# Altium PCB pcb.PcbDoc (part 6 of 9)
Units mil, origin at the board's own origin, x right, y up, seen from the top; angles counter-clockwise.
Board outline 3937.01 x 3937.01 mil, 4 copper layers (Top Layer, Ground plane, Power plane, Bottom Layer), stack 51.4 mil thick; 310 components, 276 nets, 1704 pads, 977 vias.
Unrouted connection lines stored in the file: 44.
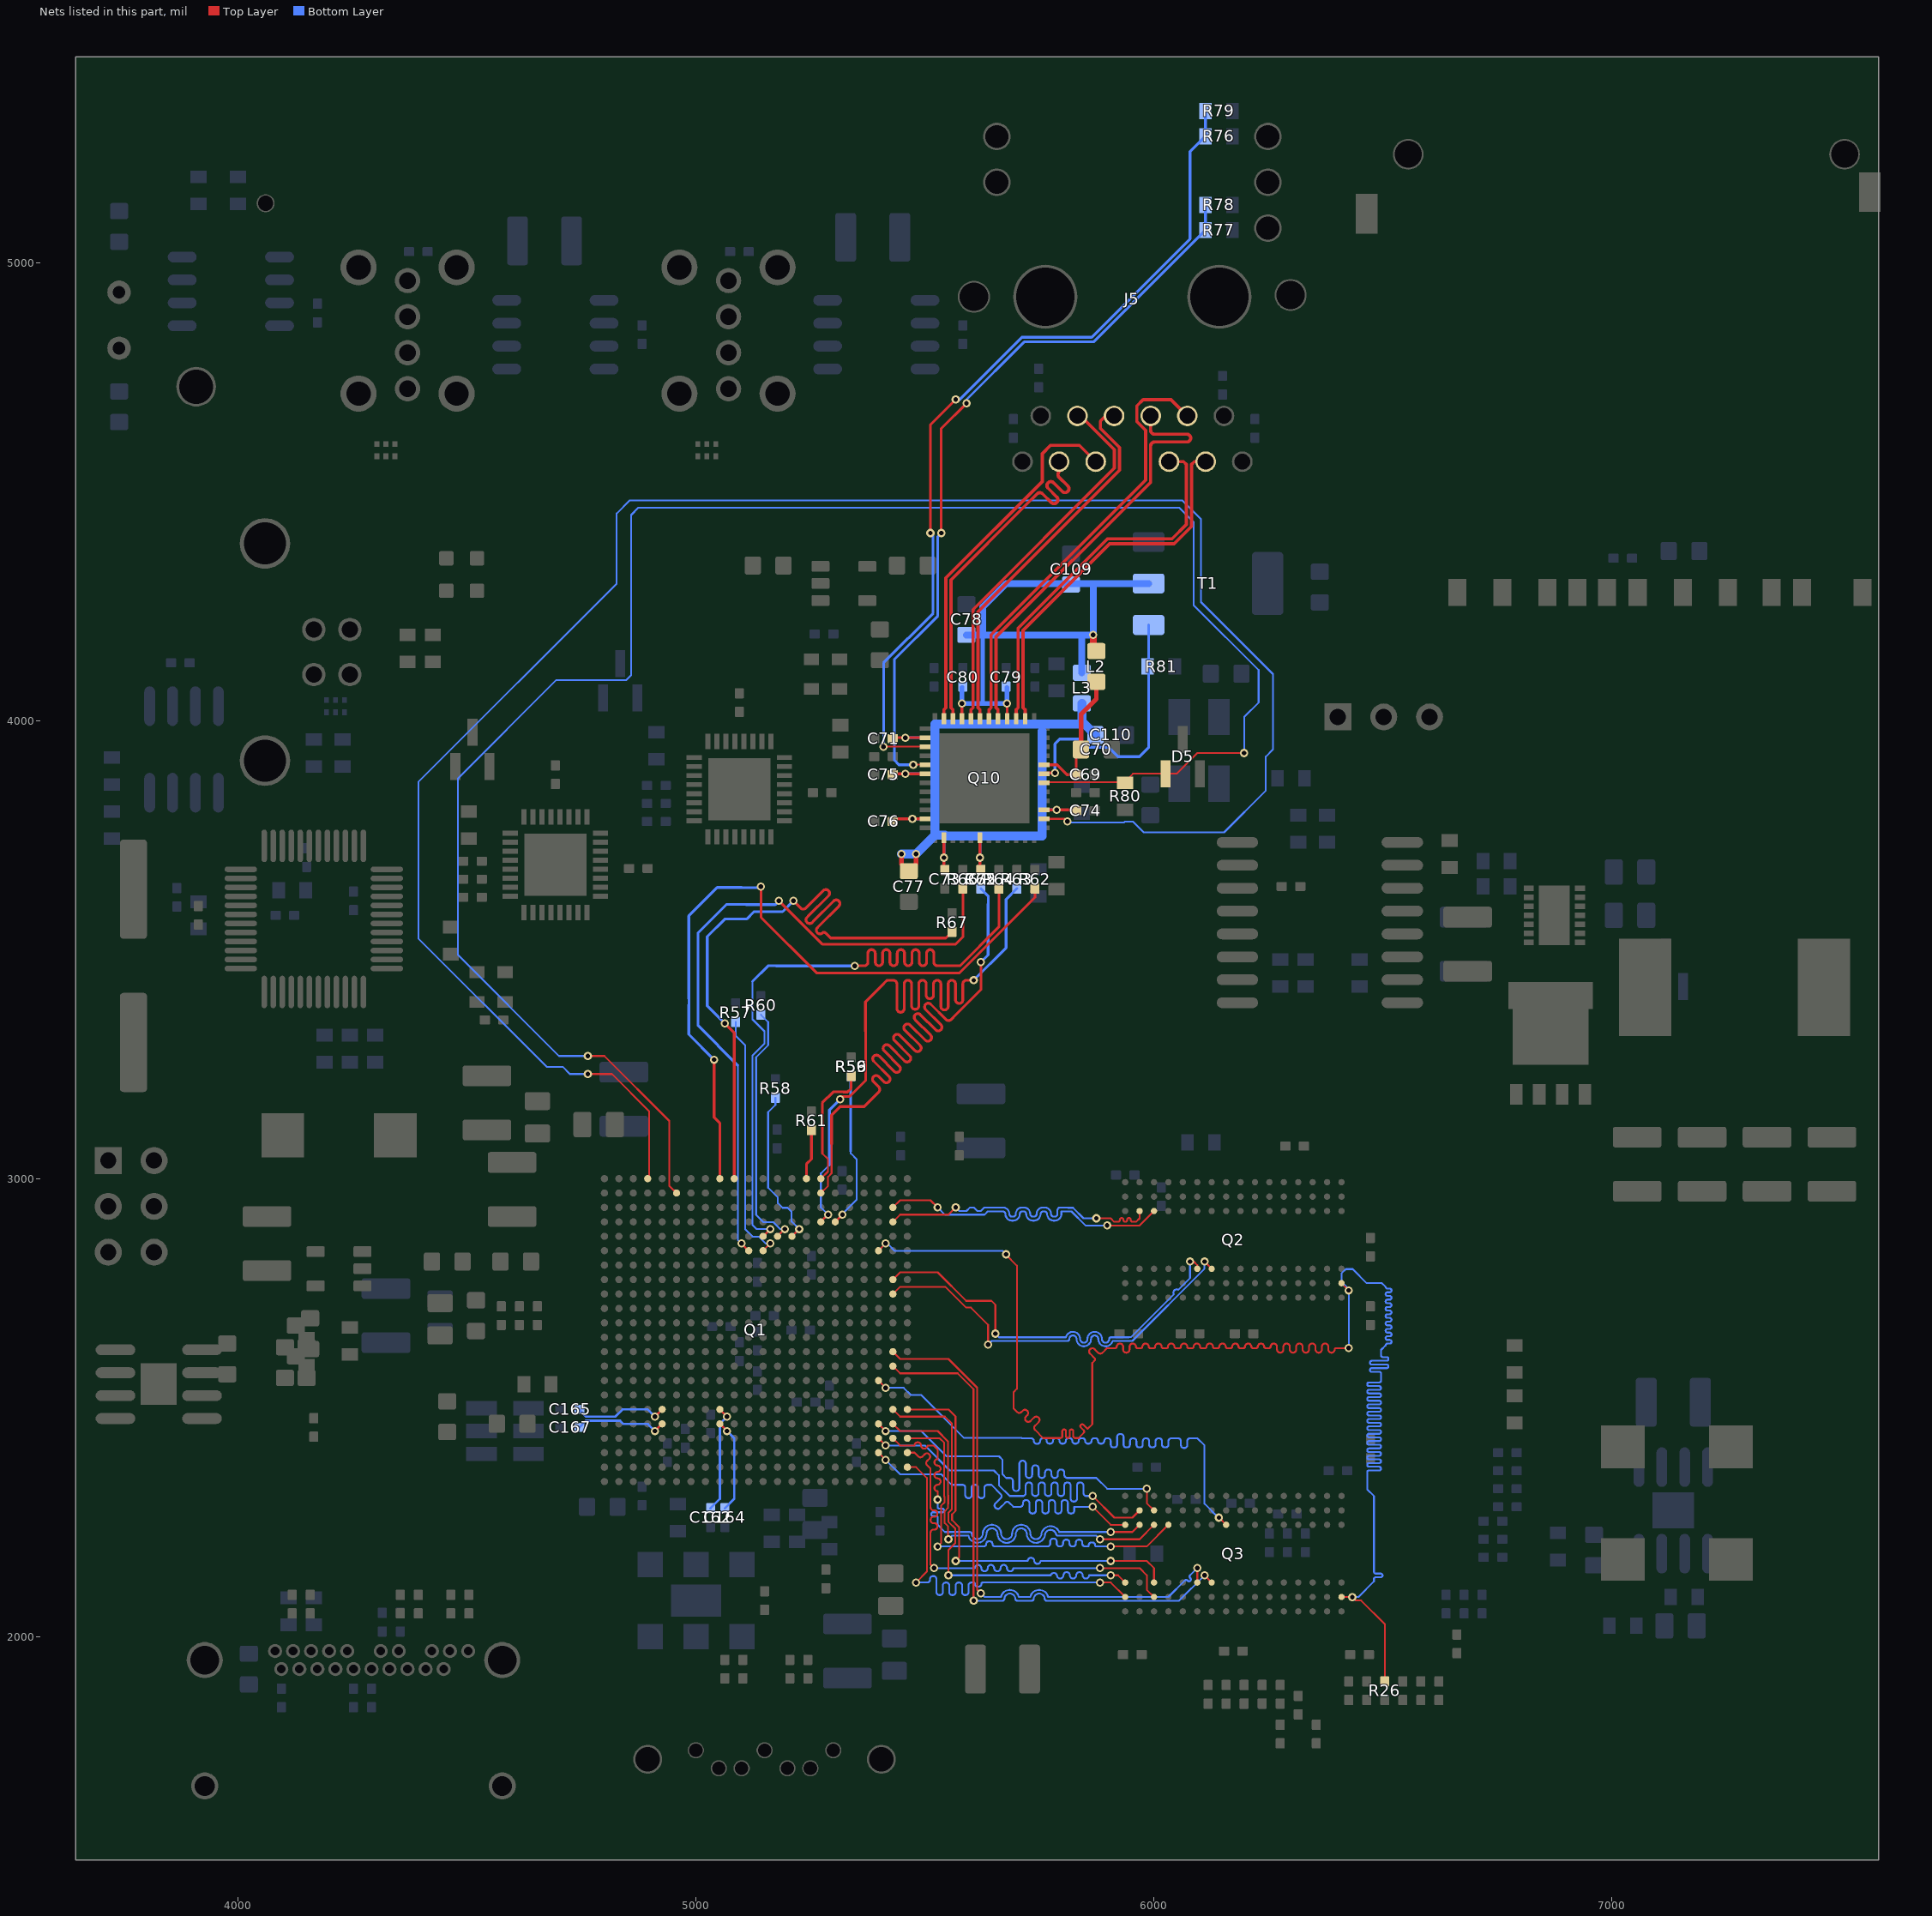
[diagram p7: the nets of this part, all layers, seen from the top]

## Via types
v1: diameter 18, hole 10, Top Layer to Bottom Layer, 932 vias
v2: diameter 19.68, hole 9.84, Top Layer to Bottom Layer, tented both sides, 18 vias
v3: diameter 19.68, hole 9.84, Top Layer to Bottom Layer, 16 vias
v4: diameter 19.68, hole 7.87, Top Layer to Bottom Layer, 11 vias

## Nets (pads, with @x,y where several pads share a name; then routed paths per layer and width w, separated by ;. In a path a pad name is that pad's centre, name@x,y a point inside that pad or via, vN(x,y) a via of type N, cw(c..) or ccw(c..) an arc to the next point about the centre after c; other vN are vias at no path point) (continued)
DQ23: Q1.R20 Q3.H7 | length 1240.2
  Top Layer w4: Q1.R20@5398.43,2559.05 v1(5414.17,2543.31) ; v1(6141.73,2259.84) Q3.H7@6157.48,2244.09
  Bottom Layer w4: v1(5414.17,2543.31) 5453.54,2543.31 5469.17,2527.69 5491.5,2527.69 5585.49,2433.7 5711.47,2433.7 5712.13,2433.04 5731.88,2433.04 cw(c5731.88,2427.41) 5737.52,2427.41 ccw(c5743.82,2427.41) 5743.82,2421.11 5745.22,2421.11 ccw(c5745.22,2427.41) 5751.52,2427.41 cw(c5757.15,2427.41) 5757.15,2433.04 5760.13,2433.04 cw(c5760.13,2427.66) 5765.52,2427.66 ccw(c5771.82,2427.66) 5771.82,2421.36 5773.22,2421.36 ccw(c5773.22,2427.66) 5779.52,2427.66 cw(c5784.9,2427.66) 5784.9,2433.04 5788.13,2433.04 cw(c5788.13,2427.66) 5793.52,2427.66 ccw(c5799.82,2427.66) 5799.82,2421.36 5801.22,2421.36 ccw(c5801.22,2427.66) 5807.52,2427.66 cw(c5812.9,2427.66) 5812.9,2433.04 5816.13,2433.04 cw(c5816.13,2427.66) 5821.52,2427.66 ccw(c5827.82,2427.66) 5827.82,2421.36 5829.22,2421.36 ccw(c5829.22,2427.66) 5835.52,2427.66 cw(c5840.9,2427.66) 5840.9,2433.04 5844.13,2433.04 cw(c5844.13,2427.66) 5849.52,2427.66 ccw(c5855.82,2427.66) 5855.82,2421.36 5857.22,2421.36 ccw(c5857.22,2427.66) 5863.52,2427.66 cw(c5868.9,2427.66) 5868.9,2433.04 5872.13,2433.04 cw(c5872.13,2427.66) 5877.52,2427.66 ccw(c5883.82,2427.66) 5883.82,2421.36 5885.22,2421.36 ccw(c5885.22,2427.66) 5891.52,2427.66 cw(c5896.9,2427.66) 5896.9,2433.04 5899.22,2433.04 cw(c5899.22,2426.74) 5905.52,2426.74 5905.52,2419.34 ccw(c5911.82,2419.34) 5911.82,2413.04 5913.22,2413.04 ccw(c5913.22,2419.34) 5919.52,2419.34 5919.52,2435.94 cw(c5925.82,2435.94) 5925.82,2442.24 5927.22,2442.24 cw(c5927.22,2435.94) 5933.52,2435.94 5933.52,2419.34 ccw(c5939.82,2419.34) 5939.82,2413.04 5941.22,2413.04 ccw(c5941.22,2419.34) 5947.52,2419.34 5947.52,2426.74 cw(c5953.82,2426.74) 5953.82,2433.04 5955.22,2433.04 cw(c5955.22,2426.74) 5961.52,2426.74 5961.52,2419.34 ccw(c5967.82,2419.34) 5967.82,2413.04 5969.22,2413.04 ccw(c5969.22,2419.34) 5975.52,2419.34 5975.52,2426.74 cw(c5981.82,2426.74) 5981.82,2433.04 5983.22,2433.04 cw(c5983.22,2426.74) 5989.52,2426.74 5989.52,2419.34 ccw(c5995.82,2419.34) 5995.82,2413.04 5997.22,2413.04 ccw(c5997.22,2419.34) 6003.52,2419.34 6003.52,2426.74 cw(c6009.82,2426.74) 6009.82,2433.04 6011.22,2433.04 cw(c6011.22,2426.74) 6017.52,2426.74 6017.52,2419.34 ccw(c6023.82,2419.34) 6023.82,2413.04 6025.22,2413.04 ccw(c6025.22,2419.34) 6031.52,2419.34 6031.52,2426.74 cw(c6037.82,2426.74) 6037.82,2433.04 6052.52,2433.04 cw(c6052.52,2426.74) 6058.82,2426.74 6058.82,2418.22 ccw(c6065.12,2418.22) 6065.12,2411.92 6066.52,2411.92 ccw(c6066.52,2418.22) 6072.82,2418.22 6072.82,2427.12 cw(c6078.74,2427.12) 6078.74,2433.04 6094.52,2433.04 6110.24,2417.32 6110.24,2290.31 6140.7,2259.84 v1(6141.73,2259.84)
DQ24: Q1.W22 Q3.D7 | length 925.2
  Top Layer w4: Q1.W22@5461.42,2433.07 5531.99,2433.07 5541.92,2423.14 5541.92,2306.06 5542.56,2305.43 5542.56,2293 5534.92,2285.36 5534.92,2204.21 v1(5527.56,2196.85) ; v1(5905.51,2196.85) 5984.25,2196.85 Q3.D7@6031.5,2244.09
  Bottom Layer w4: v1(5527.56,2196.85) 5628.32,2196.85 ccw(c5628.32,2201.96) 5633.43,2201.96 cw(c5639.73,2201.96) 5639.73,2208.26 5641.13,2208.26 cw(c5641.13,2201.96) 5647.43,2201.96 ccw(c5652.53,2201.96) 5652.53,2196.85 5767.13,2196.85 ccw(c5767.13,2203.15) 5773.43,2203.15 5773.43,2207.74 cw(c5779.73,2207.74) 5779.73,2214.04 5781.13,2214.04 cw(c5781.13,2207.74) 5787.43,2207.74 5787.43,2203.15 ccw(c5793.73,2203.15) 5793.73,2196.85 5795.13,2196.85 ccw(c5795.13,2203.15) 5801.43,2203.15 5801.43,2205.34 cw(c5807.73,2205.34) 5807.73,2211.64 5809.13,2211.64 cw(c5809.13,2205.34) 5815.43,2205.34 5815.43,2203.15 ccw(c5821.73,2203.15) 5821.73,2196.85 5823.13,2196.85 ccw(c5823.13,2203.15) 5829.43,2203.15 5829.43,2205.34 cw(c5835.73,2205.34) 5835.73,2211.64 5837.13,2211.64 cw(c5837.13,2205.34) 5843.43,2205.34 5843.43,2203.15 ccw(c5849.73,2203.15) 5849.73,2196.85 5854.81,2196.85 ccw(c5854.81,2199.46) 5857.43,2199.46 cw(c5863.73,2199.46) 5863.73,2205.76 5865.13,2205.76 cw(c5865.13,2199.46) 5871.43,2199.46 ccw(c5874.04,2199.46) 5874.04,2196.85 v1(5905.51,2196.85)
DQ25: Q1.U22 Q3.C3 | length 925.2
  Top Layer w4: Q1.U22@5461.42,2496.06 5551.18,2496.06 5566.56,2480.68 5566.56,2274.58 5558.92,2266.94 5558.92,2254.51 5574.18,2239.25 5574.18,2172.61 v1(5566.93,2165.35) ; v1(5905.51,2165.35) 5984.25,2165.35 6000,2149.61 Q3.C3@6000,2118.11
  Bottom Layer w4: v1(5566.93,2165.35) 5724.41,2165.35 cw(c5731.41,2165.35) 5738.41,2165.35 ccw(c5745.41,2166) 5752.41,2165.35 v1(5905.51,2165.35)
DQ26: Q1.V20 Q3.C8 | length 925.2
  Top Layer w4: Q1.V20@5398.43,2464.57 v1(5414.17,2448.82) ; v1(5984.25,2322.83) 5984.25,2291.34 Q3.C8@6000,2275.59
  Bottom Layer w4: v1(5414.17,2448.82) 5491.63,2448.82 5546.75,2393.7 5661.42,2393.7 5669.29,2385.83 5669.29,2354.33 5677.17,2346.46 5685.04,2346.46 cw(c5685.04,2339.46) 5692.04,2339.46 5692.04,2324.75 ccw(c5699.04,2324.75) 5699.04,2317.75 ccw(c5699.04,2324.75) 5706.04,2324.75 5706.04,2377.25 cw(c5713.04,2377.25) 5713.04,2384.25 cw(c5713.04,2377.25) 5720.04,2377.25 5720.04,2353.46 ccw(c5727.04,2353.46) 5727.04,2346.46 ccw(c5727.04,2353.46) 5734.04,2353.46 5734.04,2367.2 cw(c5741.04,2367.2) 5741.04,2374.2 cw(c5741.04,2367.2) 5748.04,2367.2 5748.04,2353.46 ccw(c5755.04,2353.46) 5755.04,2346.46 ccw(c5755.04,2353.46) 5762.04,2353.46 5762.04,2357.96 cw(c5769.04,2357.96) 5769.04,2364.96 cw(c5769.04,2357.96) 5776.04,2357.96 5776.04,2353.46 ccw(c5783.04,2353.46) 5783.04,2346.46 ccw(c5783.04,2353.46) 5790.04,2353.46 5790.04,2357.96 cw(c5797.04,2357.96) 5797.04,2364.96 cw(c5797.04,2357.96) 5804.04,2357.96 5804.04,2353.46 ccw(c5811.04,2353.46) 5811.04,2346.46 5874.21,2346.46 5897.84,2322.83 v1(5984.25,2322.83)
DQ27: Q1.U21 Q3.A3 | length 925.2
  Top Layer w4: Q1.U21@5429.92,2496.06 5445.67,2480.31 5543.31,2480.31 5558.56,2465.06 5558.56,2277.89 5550.92,2270.25 5550.92,2251.2 5566.18,2235.94 5566.18,2203.98 5551.18,2188.98 v1(5551.18,2133.86) ; v1(5905.51,2133.86) 5921.26,2133.86 Q3.A3@5937.01,2118.11
  Bottom Layer w4: v1(5551.18,2133.86) 5774.27,2133.86 cw(c5781.27,2131.6) 5788.27,2133.86 ccw(c5795.27,2133.86) 5802.27,2133.86 cw(c5809.27,2133.86) 5816.27,2133.86 ccw(c5823.27,2133.86) 5830.27,2133.86 cw(c5837.27,2133.86) 5844.27,2133.86 ccw(c5851.27,2133.86) 5858.27,2133.86 v1(5905.51,2133.86)
DQ28: Q1.Y20 Q3.A7 | length 925.2
  Top Layer w4: Q1.Y20@5398.43,2401.57 v1(5414.17,2385.83) ; v1(5866.13,2283.46) 5905.5,2244.09 5929.13,2244.09
  Bottom Layer w4: v1(5414.17,2385.83) 5445.67,2354.33 5535.43,2354.33 5558.31,2331.46 5581.63,2331.46 cw(c5581.63,2325.16) 5587.93,2325.16 5587.93,2308.75 ccw(c5594.23,2308.75) 5594.23,2302.45 5595.63,2302.45 ccw(c5595.63,2308.75) 5601.93,2308.75 5601.93,2325.16 cw(c5608.23,2325.16) 5608.23,2331.46 5609.63,2331.46 cw(c5609.63,2325.16) 5615.93,2325.16 5615.93,2308.75 ccw(c5622.23,2308.75) 5622.23,2302.45 5623.63,2302.45 ccw(c5623.63,2308.75) 5629.93,2308.75 5629.93,2325.16 cw(c5636.23,2325.16) 5636.23,2331.46 5644.92,2331.46 5665.22,2311.16 cw(c5660.76,2306.71) 5665.22,2302.25 5653.62,2290.65 ccw(c5658.07,2286.2) 5653.62,2281.75 5654.61,2280.76 ccw(c5659.06,2285.21) 5663.52,2280.76 5675.11,2292.35 cw(c5679.57,2287.9) 5684.02,2292.35 5692.92,2283.46 5707.62,2283.46 ccw(c5707.62,2289.76) 5713.92,2289.76 5713.92,2291.79 cw(c5720.22,2291.79) 5720.22,2298.09 5721.62,2298.09 cw(c5721.62,2291.79) 5727.92,2291.79 5727.92,2275.14 ccw(c5734.22,2275.14) 5734.22,2268.84 5735.62,2268.84 ccw(c5735.62,2275.14) 5741.92,2275.14 5741.92,2291.79 cw(c5748.22,2291.79) 5748.22,2298.09 5749.62,2298.09 cw(c5749.62,2291.79) 5755.92,2291.79 5755.92,2275.14 ccw(c5762.22,2275.14) 5762.22,2268.84 5763.62,2268.84 ccw(c5763.62,2275.14) 5769.92,2275.14 5769.92,2291.79 cw(c5776.22,2291.79) 5776.22,2298.09 5777.62,2298.09 cw(c5777.62,2291.79) 5783.92,2291.79 5783.92,2275.14 ccw(c5790.22,2275.14) 5790.22,2268.84 5791.62,2268.84 ccw(c5791.62,2275.14) 5797.92,2275.14 5797.92,2291.79 cw(c5804.22,2291.79) 5804.22,2298.09 5805.62,2298.09 cw(c5805.62,2291.79) 5811.92,2291.79 5811.92,2275.14 ccw(c5818.22,2275.14) 5818.22,2268.84 5819.62,2268.84 ccw(c5819.62,2275.14) 5825.92,2275.14 5825.92,2282.61 cw(c5826.77,2282.61) 5826.77,2283.46 v1(5866.13,2283.46)
DQ29: Q1.AA22 Q3.A2 | length 925.2
  Top Layer w4: Q1.AA22@5461.42,2370.08 5480.61,2370.08 5504.06,2346.62 5504.06,2193.54 5503.94,2193.41 5503.94,2141.73 v1(5480.31,2118.11) ; v1(5881.89,2118.11) 5905.51,2118.11 Q3.A2@5937.01,2086.61
  Bottom Layer w4: v1(5480.31,2118.11) 5504.62,2118.11 ccw(c5504.62,2124.41) 5510.92,2124.41 5510.92,2125.7 cw(c5517.22,2125.7) 5517.22,2132 5518.62,2132 cw(c5518.62,2125.7) 5524.92,2125.7 5524.92,2097.05 ccw(c5531.22,2097.05) 5531.22,2090.75 5532.62,2090.75 ccw(c5532.62,2097.05) 5538.92,2097.05 5538.92,2111.81 cw(c5545.22,2111.81) 5545.22,2118.11 5546.62,2118.11 cw(c5546.62,2111.81) 5552.92,2111.81 5552.92,2097.05 ccw(c5559.22,2097.05) 5559.22,2090.75 5560.62,2090.75 ccw(c5560.62,2097.05) 5566.92,2097.05 5566.92,2111.81 cw(c5573.22,2111.81) 5573.22,2118.11 5574.62,2118.11 cw(c5574.62,2111.81) 5580.92,2111.81 5580.92,2097.05 ccw(c5587.22,2097.05) 5587.22,2090.75 5588.62,2090.75 ccw(c5588.62,2097.05) 5594.92,2097.05 5594.92,2111.81 cw(c5601.22,2111.81) 5601.22,2118.11 5605.89,2118.11 cw(c5605.89,2115.08) 5608.92,2115.08 ccw(c5615.22,2115.08) 5615.22,2108.78 5616.62,2108.78 ccw(c5616.62,2115.08) 5622.92,2115.08 cw(c5625.95,2115.08) 5625.95,2118.11 v1(5881.89,2118.11)
DQ30: Q1.W20 Q3.B8 | length 925.2
  Top Layer w4: Q1.W20@5398.43,2433.07 v1(5414.17,2417.32) ; v1(5866.14,2307.09) 5913.39,2259.84 5952.76,2259.84 Q3.B8@5968.5,2275.59
  Bottom Layer w4: v1(5414.17,2417.32) 5499.5,2417.32 5553.87,2362.95 5650.39,2362.95 5661.29,2352.05 5661.29,2330.71 5684.91,2307.09 5713.61,2307.09 ccw(c5713.61,2313.39) 5719.91,2313.39 5719.91,2330.2 cw(c5726.21,2330.2) 5726.21,2336.5 5727.61,2336.5 cw(c5727.61,2330.2) 5733.91,2330.2 5733.91,2313.39 ccw(c5740.21,2313.39) 5740.21,2307.09 5741.61,2307.09 ccw(c5741.61,2313.39) 5747.91,2313.39 5747.91,2330.2 cw(c5754.21,2330.2) 5754.21,2336.5 5755.61,2336.5 cw(c5755.61,2330.2) 5761.91,2330.2 5761.91,2313.39 ccw(c5768.21,2313.39) 5768.21,2307.09 5769.61,2307.09 ccw(c5769.61,2313.39) 5775.91,2313.39 5775.91,2330.2 cw(c5782.21,2330.2) 5782.21,2336.5 5783.61,2336.5 cw(c5783.61,2330.2) 5789.91,2330.2 5789.91,2313.39 ccw(c5796.21,2313.39) 5796.21,2307.09 5797.61,2307.09 ccw(c5797.61,2313.39) 5803.91,2313.39 5803.91,2330.2 cw(c5810.21,2330.2) 5810.21,2336.5 5811.61,2336.5 cw(c5811.61,2330.2) 5817.91,2330.2 5817.91,2301.24 ccw(c5824.21,2301.24) 5824.21,2294.94 5825.61,2294.94 ccw(c5825.61,2301.24) 5831.91,2301.24 5831.91,2330.2 cw(c5838.21,2330.2) 5838.21,2336.5 5839.61,2336.5 cw(c5839.61,2330.2) 5845.91,2330.2 5845.91,2313.39 ccw(c5852.21,2313.39) 5852.21,2307.09 v1(5866.14,2307.09)
DQ31: Q1.Y22 Q3.C2 | length 925.1
  Top Layer w4: Q1.Y22@5461.42,2401.57 5477.17,2401.57 5485.53,2393.21 ccw(c5489.99,2397.66) 5494.44,2393.21 5499.68,2398.44 cw(c5504.13,2393.98) 5508.59,2398.44 5509.58,2397.45 cw(c5505.12,2392.99) 5509.58,2388.54 5504.34,2383.31 ccw(c5508.8,2378.85) 5504.34,2374.4 5512.06,2366.68 5512.06,2281.98 ccw(c5518.36,2281.98) 5518.36,2275.68 5520.62,2275.68 cw(c5520.62,2269.38) 5526.92,2269.38 5526.92,2267.98 cw(c5520.62,2267.98) 5520.62,2261.68 5518.36,2261.68 ccw(c5518.36,2255.38) 5512.06,2255.38 5512.06,2253.98 ccw(c5518.36,2253.98) 5518.36,2247.68 5520.62,2247.68 cw(c5520.62,2241.38) 5526.92,2241.38 5526.92,2239.98 cw(c5520.62,2239.98) 5520.62,2233.68 5518.36,2233.68 ccw(c5518.36,2227.38) 5512.06,2227.38 5512.06,2157.23 v1(5519.69,2149.61) ; v1(5881.89,2149.61) 5968.5,2149.61 5984.25,2133.86 5984.25,2102.36 Q3.C2@6000,2086.61
  Bottom Layer w4: v1(5519.69,2149.61) 5608.91,2149.61 cw(c5615.91,2149.61) 5622.91,2149.61 ccw(c5629.91,2149.61) 5636.91,2149.61 cw(c5643.91,2149.61) 5650.91,2149.61 ccw(c5657.91,2149.61) 5664.91,2149.61 cw(c5671.91,2149.61) 5678.91,2149.61 ccw(c5685.91,2149.61) 5692.91,2149.61 v1(5881.89,2149.61)
DQS0_N: Q1.J21 Q2.G3 | length 923.6
  Top Layer w4: Q1.J21@5429.92,2748.03 5445.67,2763.78 5544.3,2763.78 5589.8,2718.28 5600.12,2718.28 5637.78,2680.62 v1(5637.78,2637.79) ; v1(6110.24,2818.9) Q2.G3@6125.98,2803.15
  Bottom Layer w4: v1(5637.78,2637.79) 5645.66,2645.67 5661.42,2645.67 5811.02,2645.67 ccw(c5811.02,2649.61) 5814.96,2649.61 cw(c5822.9,2649.61) 5830.83,2649.61 ccw(c5846.65,2649.61) 5862.46,2649.61 cw(c5870.39,2649.61) 5878.33,2649.61 ccw(c5894.14,2649.61) 5909.45,2645.67 5952.76,2645.67 6110.24,2803.15 v1(6110.24,2818.9)
DQS0_P: Q1.H21 Q2.F3 | length 925.2
  Top Layer w4: Q1.H21@5429.92,2779.53 5445.67,2795.28 5527.56,2795.28 5589.8,2733.03 5644.92,2733.03 5653.54,2724.41 v1(5653.54,2661.42) ; v1(6078.74,2818.9) 6086.61,2818.9 6094.49,2811.02 Q2.F3@6094.49,2803.15
  Bottom Layer w4: v1(5653.54,2661.42) 5661.42,2653.54 5807.58,2653.54 cw(c5822.9,2649.61) 5838.71,2649.61 ccw(c5846.65,2649.61) 5854.58,2649.61 cw(c5870.39,2649.61) 5886.2,2649.61 ccw(c5894.14,2649.61) 5902.08,2649.61 cw(c5906.02,2649.61) 5906.02,2653.54 5944.88,2653.54 ; 5944.88,2653.67 5949.44,2653.67 6043.19,2747.42 cw(c6049.52,2751) 6053.09,2757.32 6078.74,2782.97 v1(6078.74,2818.9)
DQS1_N: Q1.D21 Q2.B7 | length 689
  Top Layer w4: Q1.D21@5429.92,2905.51 5445.67,2921.26 5535.43,2921.26 5551.18,2921.26 v1(5566.93,2937.01) ; v1(5874.02,2913.39) 5905.51,2913.39 5913.24,2905.65 5921.66,2905.65 ccw(c5921.66,2909.25) 5925.26,2909.25 5925.26,2910.17 cw(c5928.86,2910.17) 5928.86,2913.77 5929.66,2913.77 cw(c5929.66,2910.17) 5933.26,2910.17 5933.26,2909.25 ccw(c5936.86,2909.25) 5936.86,2905.65 5937.66,2905.65 ccw(c5937.66,2909.25) 5941.26,2909.25 5941.26,2910.43 cw(c5944.86,2910.43) 5944.86,2914.03 5945.66,2914.03 cw(c5945.66,2910.43) 5949.26,2910.43 5949.26,2909.25 ccw(c5952.86,2909.25) 5952.86,2905.65 5960.77,2905.65 5968.5,2913.39 Q2.B7@5968.5,2929.13
  Bottom Layer w4: v1(5566.93,2937.01) 5574.68,2929.26 5590.55,2929.26 5598.3,2937.01 5606.3,2937.01 5614.05,2929.26 5622.05,2929.26 5629.8,2937.01 5629.92,2937.01 5670.03,2937.01 cw(c5670.03,2922.87) 5684.17,2922.87 ccw(c5690.03,2922.87) 5690.03,2917.01 5692.3,2917.01 ccw(c5692.3,2922.87) 5698.17,2922.87 cw(c5712.3,2922.87) 5712.3,2937.01 5715.52,2937.01 cw(c5715.52,2922.87) 5729.66,2922.87 ccw(c5735.52,2922.87) 5735.52,2917.01 5737.8,2917.01 ccw(c5737.8,2922.87) 5743.66,2922.87 cw(c5757.8,2922.87) 5757.8,2937.01 5761.02,2937.01 cw(c5761.02,2922.87) 5775.16,2922.87 ccw(c5781.02,2922.87) 5781.02,2917.01 5783.3,2917.01 ccw(c5783.3,2922.87) 5789.16,2922.87 5789.16,2930.89 cw(c5795.28,2930.89) 5795.28,2937.01 5811.9,2937.01 5812.65,2936.26 5823.09,2936.26 5845.96,2913.39 v1(5874.02,2913.39)
DQS1_P: Q1.C21 Q2.C7 | length 689.1
  Top Layer w4: Q1.C21@5429.92,2937.01 5445.67,2952.76 5511.81,2952.76 v1(5527.56,2937.01) ; v1(5897.64,2897.64) 5968.5,2897.64 Q2.C7@6000,2929.13
  Bottom Layer w4: v1(5527.56,2937.01) 5543.31,2921.26 5629.92,2921.26 5636.92,2928.26 5670.03,2928.26 cw(c5670.03,2922.87) 5675.42,2922.87 ccw(c5690.03,2922.87) 5690.03,2908.26 5692.3,2908.26 ccw(c5692.3,2922.87) 5706.91,2922.87 cw(c5712.3,2922.87) 5712.3,2928.26 5715.52,2928.26 cw(c5715.52,2922.87) 5720.91,2922.87 ccw(c5735.52,2922.87) 5735.52,2908.26 5737.8,2908.26 ccw(c5737.8,2922.87) 5752.41,2922.87 cw(c5757.8,2922.87) 5757.8,2928.26 5761.02,2928.26 cw(c5761.02,2922.87) 5766.41,2922.87 ccw(c5781.02,2922.87) 5781.02,2908.26 5783.3,2908.26 ccw(c5783.3,2922.87) 5797.91,2922.87 5797.91,2928.26 5819.77,2928.26 5850.39,2897.64 v1(5897.64,2897.64)
DQS2_N: Q1.P21 Q3.G3 | length 1243
  Top Layer w4: Q1.P21@5429.92,2590.55 5445.67,2574.8 5571.34,2574.8 5605.91,2540.24 5605.91,2133.86 5605.8,2133.86 5605.8,2079.24 v1(5606.3,2078.74) ; v1(6110.24,2133.86) Q3.G3@6125.98,2118.11
  Bottom Layer w4: v1(5606.3,2078.74) 5606.55,2078.49 5669.29,2078.49 ccw(c5669.29,2082.49) 5673.29,2082.39 cw(c5685.29,2082.11) 5697.29,2082.39 ccw(c5701.29,2082.49) 5701.29,2078.49 5733.29,2078.49 ccw(c5733.29,2082.49) 5737.29,2082.39 ; 5737.29,2082.49 cw(c5733.29,2082.49) 5737.29,2082.39 ; v1(6110.24,2133.86) 6054.87,2078.49 5765.29,2078.49 cw(c5765.29,2082.49) 5761.29,2082.39 ccw(c5749.29,2082.11) 5737.29,2082.39
DQS2_P: Q1.N21 Q3.F3 | length 1243
  Top Layer w4: Q1.N21@5429.92,2622.05 5445.67,2606.3 5551.18,2606.3 5613.92,2543.56 5613.92,2102.61 v1(5622.05,2094.49) ; Q3.F3@6094.49,2118.11 v1(6094.49,2149.61)
  Bottom Layer w4: v1(5622.05,2094.49) 5630.05,2086.49 5665.77,2086.49 cw(c5685.29,2082.11) 5704.81,2086.49 5729.77,2086.49 cw(c5749.29,2082.11) 5768.81,2086.49 6031.37,2086.49 6067.43,2122.54 cw(c6070.25,2119.72) 6073.08,2122.54 6073.65,2121.98 ccw(c6076.48,2124.81) 6079.3,2121.98 ccw(c6076.48,2124.81) 6079.3,2127.64 6078.74,2128.2 cw(c6081.57,2131.03) 6078.74,2133.86 v1(6094.49,2149.61)
DQS3_N: Q1.W21 Q3.B7 | length 925.2
  Top Layer w4: Q1.W21@5429.92,2433.07 5445.67,2417.32 5477.17,2417.32 cw(c5484.17,2417.32) 5491.17,2417.32 ccw(c5498.17,2417.32) 5505.17,2417.32 5518.3,2417.32 5527.56,2408.06 5527.56,2387.57 ccw(c5527.56,2380.57) 5527.56,2373.57 cw(c5526.89,2366.57) 5527.56,2359.57 ccw(c5527.56,2352.57) 5527.56,2345.57 cw(c5526.89,2338.57) 5527.56,2331.57 ccw(c5527.56,2324.57) 5527.56,2317.57 v1(5527.56,2299.21) ; v1(5905.51,2228.35) 5952.76,2228.35 Q3.B7@5968.5,2244.09
  Bottom Layer w4: v1(5527.56,2299.21) 5527.56,2283.06 ccw(c5531.16,2283.06) 5531.16,2279.46 5537.85,2279.46 cw(c5537.85,2275.86) 5541.45,2275.86 5541.45,2275.06 cw(c5537.85,2275.06) 5537.85,2271.46 5517.27,2271.46 ccw(c5517.27,2267.86) 5513.67,2267.86 5513.67,2267.06 ccw(c5517.27,2267.06) 5517.27,2263.46 5523.96,2263.46 cw(c5523.96,2259.86) 5527.56,2259.86 5527.56,2244.09 5543.31,2228.35 5558.93,2228.35 5598.18,2228.35 cw(c5598.18,2224.35) 5602.18,2224.45 ; 5602.18,2224.35 ccw(c5598.18,2224.35) 5602.18,2224.45 ; 5626.18,2224.35 cw(c5646.18,2224.35) 5626.18,2224.41 ; 5626.18,2224.47 cw(c5614.18,2224.86) 5626.18,2224.41 ; 5666.18,2224.35 ccw(c5646.18,2224.35) 5666.18,2224.41 ; 5666.18,2224.47 ccw(c5678.18,2224.86) 5666.18,2224.41 ; 5690.18,2224.35 cw(c5710.18,2224.35) 5690.18,2224.41 ; 5690.18,2224.47 cw(c5678.18,2224.86) 5690.18,2224.41 ; 5730.18,2224.35 ccw(c5710.18,2224.35) 5730.18,2224.41 ; 5730.18,2224.47 ccw(c5742.18,2224.86) 5730.18,2224.41 ; 5754.18,2224.47 cw(c5742.18,2224.86) 5730.18,2224.41 ; 5754.29,2225.25 cw(c5774.18,2220.62) 5793.09,2228.35 5874.14,2228.35 v1(5905.51,2228.35) ; 5602.18,2224.45 ccw(c5614.18,2224.86) 5626.18,2224.41 ; 5626.18,2224.41 cw(c5646.18,2224.35) 5666.18,2224.41 ; 5666.18,2224.41 ccw(c5678.18,2224.86) 5690.18,2224.41 ; 5690.18,2224.41 cw(c5710.18,2224.35) 5730.18,2224.41
DQS3_P: Q1.V21 Q3.C7 | length 923.4
  Top Layer w4: Q1.V21@5429.92,2464.57 5445.67,2448.82 5527.56,2448.82 5549.92,2426.46 5549.92,2309.38 5550.56,2308.74 5550.56,2289.69 5549.92,2289.05 5549.92,2280.56 5542.92,2273.56 5542.92,2247.88 5550.45,2240.36 5550.45,2213.33 v1(5551.18,2212.6) ; v1(5881.89,2212.6) 5968.5,2212.6 Q3.C7@6000,2244.09
  Bottom Layer w4: v1(5551.18,2212.6) 5558.93,2220.35 5594.69,2220.35 ccw(c5614.18,2224.86) 5634.18,2224.22 ; 5634.18,2224.35 cw(c5646.18,2224.35) 5658.18,2224.35 ; 5658.18,2224.22 ccw(c5678.18,2224.86) 5698.18,2224.22 ; 5698.18,2224.35 cw(c5710.18,2224.35) 5722.18,2224.35 ; 5722.18,2224.22 ccw(c5742.18,2224.86) 5762.16,2223.77 cw(c5774.18,2220.62) 5786.29,2223.44 ccw(c5790.18,2224.35) 5790.18,2220.35 5874.14,2220.35 v1(5881.89,2212.6)
DRST: Q1.F20 Q2.T2 Q3.T2 R26.1 | length 4311.4
  Top Layer w4: Q1.F20@5398.43,2842.52 v1(5414.17,2858.27) ; v1(5677.17,2834.65) 5677.17,2833.61 5700.66,2810.12 5700.66,2541.24 5693.66,2534.24 5693.66,2497.72 5700.79,2490.6 ccw(c5705.74,2495.55) 5710.69,2490.6 5713.28,2493.19 cw(c5718.23,2488.24) 5723.18,2493.19 cw(c5718.23,2488.24) 5723.18,2483.29 5720.59,2480.7 ccw(c5725.54,2475.75) 5720.59,2470.8 ccw(c5725.54,2475.75) 5730.49,2470.8 5738.03,2478.34 cw(c5742.98,2473.39) 5747.93,2478.34 cw(c5742.98,2473.39) 5747.93,2468.44 5740.39,2460.9 ccw(c5745.34,2455.95) 5740.39,2451 5757.81,2433.57 5795.78,2433.57 ccw(c5795.78,2437.57) 5799.78,2437.57 5799.78,2448.44 cw(c5803.78,2448.44) 5803.78,2452.44 cw(c5803.78,2448.44) 5807.78,2448.44 5807.78,2437.57 ccw(c5811.78,2437.57) 5811.78,2433.57 ccw(c5811.78,2437.57) 5815.78,2437.57 5815.78,2448.44 cw(c5819.78,2448.44) 5819.78,2452.44 cw(c5819.78,2448.44) 5823.78,2448.44 5823.78,2437.57 ccw(c5827.78,2437.57) 5827.78,2433.57 5835.15,2433.57 5846.46,2444.89 ccw(c5843.63,2447.72) 5846.46,2450.55 5840.2,2456.81 cw(c5843.03,2459.64) 5840.2,2462.47 cw(c5843.03,2459.64) 5845.86,2462.47 5853.85,2454.48 ccw(c5854.95,2455.58) 5856.05,2454.48 5865.27,2463.69 5865.27,2597.55 5870.08,2602.36 ccw(c5867.27,2605.17) 5870.08,2607.98 5860.43,2617.63 cw(c5865.38,2622.58) 5860.43,2627.53 cw(c5865.38,2622.58) 5870.33,2627.53 5877.84,2620.02 ccw(c5882.79,2624.97) 5887.74,2620.02 5897.64,2629.92 5915.57,2629.92 ccw(c5915.57,2632.92) 5918.57,2632.92 cw(c5925.57,2632.92) 5925.57,2639.92 cw(c5925.57,2632.92) 5932.57,2632.92 5932.57,2626.92 ccw(c5939.57,2626.92) 5939.57,2619.92 ccw(c5939.57,2626.92) 5946.57,2626.92 5946.57,2632.92 cw(c5953.57,2632.92) 5953.57,2639.92 cw(c5953.57,2632.92) 5960.57,2632.92 ccw(c5963.57,2632.92) 5963.57,2629.92 5971.57,2629.92 ccw(c5971.57,2632.92) 5974.57,2632.92 cw(c5981.57,2632.92) 5981.57,2639.92 cw(c5981.57,2632.92) 5988.57,2632.92 ccw(c5991.57,2632.92) 5991.57,2629.92 5999.57,2629.92 ccw(c5999.57,2632.92) 6002.57,2632.92 cw(c6009.57,2632.92) 6009.57,2639.92 cw(c6009.57,2632.92) 6016.57,2632.92 ccw(c6019.57,2632.92) 6019.57,2629.92 6027.57,2629.92 ccw(c6027.57,2632.92) 6030.57,2632.92 cw(c6037.57,2632.92) 6037.57,2639.92 cw(c6037.57,2632.92) 6044.57,2632.92 ccw(c6047.57,2632.92) 6047.57,2629.92 6055.57,2629.92 ccw(c6055.57,2632.92) 6058.57,2632.92 cw(c6065.57,2632.92) 6065.57,2639.92 cw(c6065.57,2632.92) 6072.57,2632.92 ccw(c6075.57,2632.92) 6075.57,2629.92 6083.57,2629.92 ccw(c6083.57,2632.92) 6086.57,2632.92 cw(c6093.57,2632.92) 6093.57,2639.92 cw(c6093.57,2632.92) 6100.57,2632.92 ccw(c6103.57,2632.92) 6103.57,2629.92 6111.57,2629.92 ccw(c6111.57,2632.92) 6114.57,2632.92 cw(c6121.57,2632.92) 6121.57,2639.92 cw(c6121.57,2632.92) 6128.57,2632.92 ccw(c6131.57,2632.92) 6131.57,2629.92 6139.57,2629.92 ccw(c6139.57,2632.92) 6142.57,2632.92 cw(c6149.57,2632.92) 6149.57,2639.92 cw(c6149.57,2632.92) 6156.57,2632.92 ccw(c6159.57,2632.92) 6159.57,2629.92 6167.57,2629.92 ccw(c6167.57,2632.92) 6170.57,2632.92 cw(c6177.57,2632.92) 6177.57,2639.92 cw(c6177.57,2632.92) 6184.57,2632.92 ccw(c6187.57,2632.92) 6187.57,2629.92 6195.57,2629.92 ccw(c6195.57,2632.92) 6198.57,2632.92 cw(c6205.57,2632.92) 6205.57,2639.92 cw(c6205.57,2632.92) 6212.57,2632.92 ccw(c6215.57,2632.92) 6215.57,2629.92 6223.57,2629.92 ccw(c6223.57,2632.92) 6226.57,2632.92 cw(c6233.57,2632.92) 6233.57,2639.92 cw(c6233.57,2632.92) 6240.57,2632.92 ccw(c6243.57,2632.92) 6243.57,2629.92 6251.57,2629.92 ccw(c6251.57,2632.92) 6254.57,2632.92 cw(c6261.57,2632.92) 6261.57,2639.92 cw(c6261.57,2632.92) 6268.57,2632.92 6268.57,2626.92 ccw(c6275.57,2626.92) 6275.57,2619.92 ccw(c6275.57,2626.92) 6282.57,2626.92 6282.57,2632.92 cw(c6289.57,2632.92) 6289.57,2639.92 cw(c6289.57,2632.92) 6296.57,2632.92 6296.57,2626.92 ccw(c6303.57,2626.92) 6303.57,2619.92 ccw(c6303.57,2626.92) 6310.57,2626.92 6310.57,2632.92 cw(c6317.57,2632.92) 6317.57,2639.92 cw(c6317.57,2632.92) 6324.57,2632.92 6324.57,2626.92 ccw(c6331.57,2626.92) 6331.57,2619.92 ccw(c6331.57,2626.92) 6338.57,2626.92 6338.57,2632.92 cw(c6345.57,2632.92) 6345.57,2639.92 cw(c6345.57,2632.92) 6352.57,2632.92 6352.57,2626.92 ccw(c6359.57,2626.92) 6359.57,2619.92 ccw(c6359.57,2626.92) 6366.57,2626.92 6366.57,2632.92 cw(c6373.57,2632.92) 6373.57,2639.92 cw(c6373.57,2632.92) 6380.57,2632.92 6380.57,2626.92 ccw(c6387.57,2626.92) 6387.57,2619.92 ccw(c6387.57,2626.92) 6394.57,2626.92 cw(c6397.57,2626.92) 6397.57,2629.92 v1(6425.2,2629.92) ; Q3.T2@6409.45,2086.61 6433.07,2086.61 v1(6433.07,2086.03) 6440.23,2078.87 6452.13,2078.87 6504.06,2026.94 6504.06,1902.29 R26.1@6503.94,1902.17 ; Q2.T2@6409.45,2771.65 v1(6425.2,2755.91)
  Bottom Layer w4: v1(5414.17,2858.27) 5417.61,2858.27 5433.74,2842.14 5669.67,2842.14 v1(5677.17,2834.65) ; v1(6425.2,2629.92) v1(6425.2,2755.91) 6425.2,2759.35 6409.45,2775.09 6409.45,2792.87 6418.98,2802.4 6433.82,2802.4 6464.44,2771.78 6497.67,2771.78 6505.67,2763.78 ccw(c6509.67,2763.78) 6509.67,2759.78 6514.69,2759.78 cw(c6514.69,2755.78) 6518.69,2755.78 cw(c6514.69,2755.78) 6514.69,2751.78 6509.67,2751.78 ccw(c6509.67,2747.78) 6505.67,2747.78 ccw(c6509.67,2747.78) 6509.67,2743.78 6514.69,2743.78 cw(c6514.69,2739.78) 6518.69,2739.78 cw(c6514.69,2739.78) 6514.69,2735.78 6509.67,2735.78 ccw(c6509.67,2731.78) 6505.67,2731.78 ccw(c6509.67,2731.78) 6509.67,2727.78 6514.69,2727.78 cw(c6514.69,2723.78) 6518.69,2723.78 cw(c6514.69,2723.78) 6514.69,2719.78 6509.67,2719.78 ccw(c6509.67,2715.78) 6505.67,2715.78 ccw(c6509.67,2715.78) 6509.67,2711.78 6514.69,2711.78 cw(c6514.69,2707.78) 6518.69,2707.78 cw(c6514.69,2707.78) 6514.69,2703.78 6509.67,2703.78 ccw(c6509.67,2699.78) 6505.67,2699.78 ccw(c6509.67,2699.78) 6509.67,2695.78 6514.69,2695.78 cw(c6514.69,2691.78) 6518.69,2691.78 cw(c6514.69,2691.78) 6514.69,2687.78 6509.67,2687.78 ccw(c6509.67,2683.78) 6505.67,2683.78 ccw(c6509.67,2683.78) 6509.67,2679.78 6514.69,2679.78 cw(c6514.69,2675.78) 6518.69,2675.78 cw(c6514.69,2675.78) 6514.69,2671.78 6509.67,2671.78 ccw(c6509.67,2667.78) 6505.67,2667.78 ccw(c6509.67,2667.78) 6509.67,2663.78 6514.69,2663.78 cw(c6514.69,2659.78) 6518.69,2659.78 cw(c6514.69,2659.78) 6514.69,2655.78 6509.67,2655.78 ccw(c6509.67,2651.78) 6505.67,2651.78 ccw(c6509.67,2651.78) 6509.67,2647.78 6514.69,2647.78 cw(c6514.69,2643.78) 6518.69,2643.78 cw(c6514.69,2643.78) 6514.69,2639.78 6509.67,2639.78 ccw(c6509.67,2635.78) 6505.67,2635.78 6495.81,2625.92 6495.81,2614.17 ccw(c6499.81,2614.17) 6499.81,2610.17 6507.99,2610.17 cw(c6507.99,2606.17) 6511.99,2606.17 cw(c6507.99,2606.17) 6507.99,2602.17 6475.39,2602.17 ccw(c6475.39,2598.17) 6471.39,2598.17 ccw(c6475.39,2598.17) 6475.39,2594.17 6507.99,2594.17 cw(c6507.99,2590.17) 6511.99,2590.17 cw(c6507.99,2590.17) 6507.99,2586.17 6475.39,2586.17 ccw(c6475.39,2582.17) 6471.39,2582.17 ccw(c6475.39,2582.17) 6475.39,2578.17 6491.81,2578.17 cw(c6491.81,2574.17) 6495.81,2574.17 6495.81,2558.93 cw(c6491.81,2558.93) 6491.81,2554.93 6469.48,2554.93 ccw(c6469.48,2550.93) 6465.48,2550.93 ccw(c6469.48,2550.93) 6469.48,2546.93 6491.81,2546.93 cw(c6491.81,2542.93) 6495.81,2542.93 cw(c6491.81,2542.93) 6491.81,2538.93 6469.48,2538.93 ccw(c6469.48,2534.93) 6465.48,2534.93 ccw(c6469.48,2534.93) 6469.48,2530.93 6491.81,2530.93 cw(c6491.81,2526.93) 6495.81,2526.93 cw(c6491.81,2526.93) 6491.81,2522.93 6469.48,2522.93 ccw(c6469.48,2518.93) 6465.48,2518.93 ccw(c6469.48,2518.93) 6469.48,2514.93 6491.81,2514.93 cw(c6491.81,2510.93) 6495.81,2510.93 cw(c6491.81,2510.93) 6491.81,2506.93 6469.48,2506.93 ccw(c6469.48,2502.93) 6465.48,2502.93 ccw(c6469.48,2502.93) 6469.48,2498.93 6491.81,2498.93 cw(c6491.81,2494.93) 6495.81,2494.93 cw(c6491.81,2494.93) 6491.81,2490.93 6469.48,2490.93 ccw(c6469.48,2486.93) 6465.48,2486.93 ccw(c6469.48,2486.93) 6469.48,2482.93 6491.81,2482.93 cw(c6491.81,2478.93) 6495.81,2478.93 cw(c6491.81,2478.93) 6491.81,2474.93 6469.48,2474.93 ccw(c6469.48,2470.93) 6465.48,2470.93 ccw(c6469.48,2470.93) 6469.48,2466.93 6491.81,2466.93 cw(c6491.81,2462.93) 6495.81,2462.93 cw(c6491.81,2462.93) 6491.81,2458.93 6469.48,2458.93 ccw(c6469.48,2454.93) 6465.48,2454.93 ccw(c6469.48,2454.93) 6469.48,2450.93 6491.81,2450.93 cw(c6491.81,2446.93) 6495.81,2446.93 cw(c6491.81,2446.93) 6491.81,2442.93 6469.48,2442.93 ccw(c6469.48,2438.93) 6465.48,2438.93 ccw(c6469.48,2438.93) 6469.48,2434.93 6491.81,2434.93 cw(c6491.81,2430.93) 6495.81,2430.93 cw(c6491.81,2430.93) 6491.81,2426.93 6469.48,2426.93 ccw(c6469.48,2422.93) 6465.48,2422.93 ccw(c6469.48,2422.93) 6469.48,2418.93 6491.81,2418.93 cw(c6491.81,2414.93) 6495.81,2414.93 cw(c6491.81,2414.93) 6491.81,2410.93 6469.48,2410.93 ccw(c6469.48,2406.93) 6465.48,2406.93 ccw(c6469.48,2406.93) 6469.48,2402.93 6491.81,2402.93 cw(c6491.81,2398.93) 6495.81,2398.93 cw(c6491.81,2398.93) 6491.81,2394.93 6469.48,2394.93 ccw(c6469.48,2390.93) 6465.48,2390.93 ccw(c6469.48,2390.93) 6469.48,2386.93 6491.81,2386.93 cw(c6491.81,2382.93) 6495.81,2382.93 cw(c6491.81,2382.93) 6491.81,2378.93 6469.48,2378.93 ccw(c6469.48,2374.93) 6465.48,2374.93 ccw(c6469.48,2374.93) 6469.48,2370.93 6491.81,2370.93 cw(c6491.81,2366.93) 6495.81,2366.93 cw(c6491.81,2366.93) 6491.81,2362.93 6469.48,2362.93 ccw(c6469.48,2358.93) 6465.48,2358.93 6465.48,2321.67 6480.31,2306.83 6480.31,2141.68 ccw(c6484.31,2141.68) 6484.31,2137.68 6495.02,2137.68 cw(c6495.02,2133.68) 6499.02,2133.68 cw(c6495.02,2133.68) 6495.02,2129.68 6484.31,2129.68 ccw(c6484.31,2125.68) 6480.31,2125.68 6480.31,2120.52 6446.41,2086.61 6433.07,2086.61 v1(6433.07,2086.03)
ETHA1V2: C78.2 C79.2 C80.2 C109.2 L2.1 L3.2 Q10.4 Q10.9 T1.2 | length 1327.9
  Top Layer w6: Q10.9@5580.71,4003.94 v1(5580.71,4037.4) ; Q10.4@5679.13,4003.94 v1(5679.13,4037.4)
  Top Layer w15: L2.1@5867.13,4158.46 v1(5867.13,4187.01)
  Bottom Layer w6: C80.2@5580.71,4072.24 C80.2@5582.68,4074.21
  Bottom Layer w10: C80.2@5580.71,4072.24 v1(5580.71,4037.4) v1(5679.13,4037.4) C79.2@5679.13,4072.24 ; 5625.98,4041.34 5625.98,4187.01
  Bottom Layer w15: C78.2@5590.55,4187.01 5625.98,4187.01 ; L3.2@5842.52,4104.33 5842.52,4187.01 ; T1.2@5988.19,4299.21 5867.13,4299.21 ; 5625.98,4187.01 5661.42,4187.01 5842.52,4187.01 ; 5625.98,4187.01 5625.98,4248.03 5677.17,4299.21 5867.13,4299.21 ; 5842.52,4187.01 v1(5867.13,4187.01) 5867.13,4299.21
ETHA_N: J5.10 Q10.3 | length 832.4
  Top Layer w7: Q10.3@5698.82,4003.94 5698.82,4023.61 5703.15,4027.95 5703.15,4201.41 5898.58,4396.84 6039.37,4396.84 6070.87,4428.34 6070.87,4559.06 6064.72,4565.2 J5.10@6032.76,4565.2
ETHA_P: J5.11 Q10.2 | length 825.1
  Top Layer w7: Q10.2@5718.5,4003.94 5718.5,4023.61 5714.17,4027.95 5714.17,4196.85 5903.15,4385.83 6043.93,4385.83 6081.88,4423.78 6081.88,4559.06 6088.02,4565.2 J5.11@6112.76,4565.2
ETHB_N: J5.5 Q10.6 | length 963.1
  Top Layer w7: Q10.6@5639.76,4003.94 5639.76,4023.61 5644.1,4027.95 5644.1,4187.24 5653.71,4196.85 5981.74,4524.88 5981.74,4633.79 5962.76,4652.77 5962.76,4687.17 5976.38,4700.79 6037.17,4700.79 J5.5@6072.76,4665.2
ETHB_P: J5.4 Q10.5 | length 963.1
  Top Layer w7: Q10.5@5659.45,4003.94 5659.45,4023.61 5655.11,4027.95 5655.11,4182.67 5992.76,4520.31 5992.76,4582.68 5992.76,4591.18 5992.76,4599.68 cw(c6001.26,4599.68) 6001.26,4608.18 6071.65,4608.18 ccw(c6071.65,4616.68) 6080.15,4616.68 ccw(c6071.65,4616.68) 6071.65,4625.18 6001.26,4625.18 cw(c6001.26,4633.68) 5992.76,4633.68 J5.4@5992.76,4665.2
ETHC_N: J5.2 Q10.8 | length 828.6
  Top Layer w7: Q10.8@5600.39,4003.94 5600.39,4023.61 5604.73,4027.95 5604.73,4242.35 5913.56,4551.18 5913.56,4591.49 5839.85,4665.2 J5.2@5832.76,4665.2
ETHC_P: J5.3 Q10.7 | length 831.1
  Top Layer w7: Q10.7@5620.08,4003.94 5620.08,4023.61 5615.74,4027.95 5615.74,4237.79 5924.57,4546.62 5924.57,4596.05 5883,4637.63 5883,4653.54 5894.65,4665.2 J5.3@5912.76,4665.2
ETHD1V2: C71.2 C72.2 C73.2 C74.2 C75.2 C76.2 C77.2 C110.1 L3.1 Q10.14 Q10.18 Q10.23 Q10.26 Q10.30 Q10.39 | length 1999.5
  Top Layer w6: C76.2@5429.72,3779.53 5435.63,3785.43 v1(5472.44,3785.43) Q10.23@5500,3785.43 ; C71.2@5429.72,3960.63 5431.69,3962.6 v1(5456.69,3962.6) Q10.14@5500,3962.6 ; C75.2@5431.69,3883.86 v1(5456.69,3883.86) Q10.18@5500,3883.86 ; Q10.26@5541.34,3744.09 v1(5541.34,3700.79) 5541.34,3675.79 C73.2@5543.31,3673.82 ; Q10.30@5620.08,3744.09 v1(5620.08,3700.79) 5620.08,3675.79 C72.2@5622.05,3673.82 ; Q10.39@5759.84,3805.12 v1(5787.4,3805.12) C74.2@5828.15,3805.12
  Top Layer w10: C77.2@5448.82,3687.01 v1(5448.82,3708.66) ; C77.2@5464.57,3671.26 5480.31,3687.01 v1(5480.31,3708.66)
  Bottom Layer w6: v1(5456.69,3883.86) 5521.65,3883.86 ; v1(5456.69,3962.6) 5521.65,3962.6 ; v1(5472.44,3785.43) 5521.65,3785.43 ; v1(5541.34,3700.79) 5541.34,3748.03 5543.31,3750 ; v1(5620.08,3700.79) 5620.08,3746.06 ; 5755.91,3803.15 5757.87,3805.12 v1(5787.4,3805.12)
  Bottom Layer w20: v1(5448.82,3708.66) v1(5480.31,3708.66) 5521.65,3750 ; 5541.34,3748.03 5755.91,3748.03 5755.91,3803.15 5755.91,3976.38 ; 5543.31,3750 5521.65,3750 ; L3.1@5842.52,4037.4 5842.52,3998.03 5848.43,3992.13 ; C110.1@5872.05,3968.5 5848.43,3992.13 ; 5521.65,3750 5521.65,3785.43 5521.65,3883.86 5521.65,3962.6 5521.65,3992.13 5755.91,3992.13 5848.43,3992.13
ETHD_N: J5.9 Q10.11 | length 806.8
  Top Layer w7: Q10.11@5541.34,4003.94 5541.34,4023.61 5545.67,4027.95 5545.67,4311.65 5755.91,4521.88 5755.91,4582.68 5774.09,4600.87 5837.09,4600.87 J5.9@5872.76,4565.2
ETHD_P: J5.8 Q10.10 | length 806.8
  Top Layer w7: Q10.10@5561.02,4003.94 5561.02,4023.61 5556.69,4027.95 5556.69,4307.09 5719.29,4469.69 5744.67,4495.07 cw(c5750.68,4489.06) 5756.69,4495.07 5775.63,4476.13 ccw(c5781.64,4482.14) 5787.65,4476.13 ccw(c5781.64,4482.14) 5787.65,4488.15 5768.71,4507.09 cw(c5774.72,4513.1) 5768.71,4519.11 cw(c5774.72,4513.1) 5780.74,4519.11 5799.67,4500.17 ccw(c5805.68,4506.19) 5811.69,4500.17 ccw(c5805.68,4506.19) 5811.69,4512.2 5792.76,4531.13 cw(c5798.77,4537.14) 5792.76,4543.15 J5.8@5792.76,4565.2
ETHINT: Q1.A4 Q10.38 | length 4420.9
  Top Layer w4: v1(4763.78,3228.35) 4816.45,3228.35 4897.64,3147.16 4897.64,3003.15 Q1.A4@4894.49,3000 ; Q10.38@5759.84,3785.43 5805.12,3785.43 v1(5811.02,3779.53)
  Bottom Layer w4: v1(4763.78,3228.35) 4724.28,3228.35 4708.66,3243.97 4673.85,3243.97 4393.7,3524.12 4393.7,3866.14 4826.65,4299.09 4826.65,4452.26 4854.95,4480.57 6061.75,4480.57 6102.61,4439.7 6102.61,4258.6 6259.84,4101.37 6259.84,3937.01 6244.09,3921.26 6244.09,3846.95 6153.17,3756.03 5977.28,3756.03 5953.66,3779.65 5936.1,3779.65 5933.91,3777.46 5813.09,3777.46 v1(5811.02,3779.53)
ETHLDO: Q10.43 R81.1 T1.1 | length 588.6
  Top Layer w4: Q10.43@5759.84,3883.86 Q10.43@5761.62,3885.64
  Top Layer w6: Q10.43@5761.62,3885.64 v1(5783.66,3885.64)
  Bottom Layer w6: v1(5783.66,3885.64) 5783.66,3949.01 5794.02,3959.38 5836.47,3959.38 5854.03,3941.82 5900.45,3941.82 5921.26,3921.01 5943.64,3921.01 5943.89,3921.26 5968.5,3921.26 5988.19,3940.94 T1.1@5988.19,4208.66
ETHLED1: Q10.17 R77.2 R78.2 | length 1651.4
  Top Layer w4: v1(5474.41,3903.54) Q10.17@5500,3903.54
  Top Layer w6: v1(5535.43,4409.45) 5535.43,4637.8 v1(5590.55,4692.91)
  Bottom Layer w6: v1(5474.41,3903.54) 5442.91,3903.54 5433.07,3913.39 5433.07,4133.86 5527.81,4228.6 5527.81,4401.83 v1(5535.43,4409.45) ; v1@5586.61,4696.85 5716.54,4826.77 5868.11,4826.77 R77.2@6112.2,5070.87 R78.2@6112.2,5125.98
ETHLED2: Q10.15 R76.2 R79.2 | length 1869
  Top Layer w4: v1(5409.45,3942.61) 5409.75,3942.91 Q10.15@5500,3942.91
  Top Layer w6: v1(5511.81,4409.45) 5511.81,4645.67 v1(5566.93,4700.79)
  Bottom Layer w6: v1(5409.45,3942.61) 5409.45,4125.98 5517.56,4234.09 5517.56,4403.7 v1(5511.81,4409.45) ; v1(5566.93,4700.79) 5575.8,4700.79 5711.78,4836.77 5863.97,4836.77 6078.74,5051.54 6078.74,5242.13 R76.2@6112.2,5275.59 R79.2@6112.2,5330.71
ETHPLL: C69.2 C70.2 L2.2 Q10.44 | length 300.2
  Top Layer w6: Q10.44@5759.84,3903.54 5788.38,3903.54 5810.03,3881.89 C69.2@5830.12,3881.89 5830.12,3926.57 C70.2@5840.55,3937.01
  Top Layer w10: C70.2@5840.55,3937.01 5840.55,4013.78 5874.02,4047.24 L2.2@5874.02,4084.65
ETHRESET: D5.1 Q1.B6 Q10.42 R80.2 | length 4269.7
  Top Layer w4: v1(4763.78,3267.72) 4799.71,3267.72 4941.73,3125.69 4941.73,2984.25 Q1.B6@4957.48,2968.5 ; Q10.42@5759.84,3864.17 5761.06,3865.39 5935.79,3865.39 5954.25,3883.86 D5.1@6025.59,3883.86 6049.21,3883.86 6094.49,3929.13 v1(6196.85,3929.13)
  Bottom Layer w4: v1(4763.78,3267.72) 4700.79,3267.72 4480.31,3488.19 4480.31,3874.02 4694.79,4088.49 4847.96,4088.49 4858.27,4098.8 4858.27,4448.82 4874.02,4464.57 6055.12,4464.57 6086.61,4433.07 6086.61,4251.97 6228.35,4110.24 6228.35,4039.37 6196.85,4007.87 v1(6196.85,3929.13)
ETHRXCLK: Q1.A9 R62.1 | length 1587.8
  Top Layer w6: v1(5039.62,3259.59) 5039.62,3190.22 5039.37,3189.97 5039.37,3133.86 5051.97,3121.26 Q1.A9@5051.97,3000 ; v1(5141.73,3637.8) 5141.73,3621.05 5141.98,3620.8 5141.98,3570.34 5263.76,3448.57 5574.55,3448.57 5740.16,3614.17 R62.1@5740.16,3633.27
  Bottom Layer w6: v1(5039.62,3259.59) 4984.25,3314.96 4984.25,3378.95 4984.5,3379.2 4984.5,3392.45 4984.25,3392.71 4984.25,3573.58 5046.34,3635.67 5099.21,3635.67 5099.47,3635.42 v1@5140.33,3635.42
ETHRXCTL: Q1.D16 R63.1 | length 1552
  Top Layer w5: Q1.D16@5272.44,2905.51 v1(5288.19,2921.26)
  Top Layer w6: v1(5314.96,3173.23) 5314.96,3176.74 5317.19,3178.98 5334.85,3178.98 5370.33,3214.46 5370.33,3321.59 5370.08,3321.84 5370.08,3385.83 5409.45,3425.2 5411.67,3427.41 5417.32,3433.07 5422.55,3433.07 5430.55,3433.07 cw(c5430.55,3425.07) 5438.55,3425.07 5438.55,3371.07 ccw(c5446.55,3371.07) 5446.55,3363.07 ccw(c5446.55,3371.07) 5454.55,3371.07 5454.55,3425.07 cw(c5462.55,3425.07) 5462.55,3433.07 cw(c5462.55,3425.07) 5470.55,3425.07 5470.55,3377.55 ccw(c5478.55,3377.55) 5478.55,3369.55 ccw(c5478.55,3377.55) 5486.55,3377.55 5486.55,3425.07 cw(c5494.55,3425.07) 5494.55,3433.07 cw(c5494.55,3425.07) 5502.55,3425.07 5502.55,3400.6 ccw(c5510.55,3400.6) 5510.55,3392.6 ccw(c5510.55,3400.6) 5518.55,3400.6 5518.55,3425.07 cw(c5526.55,3425.07) 5526.55,3433.07 cw(c5526.55,3425.07) 5534.55,3425.07 5534.55,3376.06 ccw(c5542.55,3376.06) 5542.55,3368.06 ccw(c5542.55,3376.06) 5550.55,3376.06 5550.55,3425.07 cw(c5558.55,3425.07) 5558.55,3433.07 cw(c5558.55,3425.07) 5566.55,3425.07 5566.55,3390.27 ccw(c5574.55,3390.27) 5574.55,3382.27 ccw(c5574.55,3390.27) 5582.55,3390.27 5582.55,3425.07 cw(c5590.55,3425.07) 5590.55,3433.07 v1@5607.89,3433.07
  Bottom Layer w4: v1(5288.19,2921.26) 5272.44,2937.01 5272.44,3011.07 5291.34,3029.97
  Bottom Layer w6: 5291.34,3029.97 5291.34,3149.61 v1(5314.96,3173.23) ; v1(5606.3,3433.07) 5677.17,3503.94 5677.17,3609.65 R63.1@5700.79,3633.27
ETHRXD0: Q1.E12 R64.1 | length 1574.8
  Top Layer w5: Q1.E12@5146.46,2874.02 v1(5162.21,2889.76)
  Top Layer w6: v1(5346.46,3464.57) 5362.2,3464.57 5367.31,3464.57 ccw(c5367.31,3472.57) 5375.31,3472.57 5375.31,3491.92 cw(c5383.31,3491.92) 5383.31,3499.92 cw(c5383.31,3491.92) 5391.31,3491.92 5391.31,3472.57 ccw(c5399.31,3472.57) 5399.31,3464.57 ccw(c5399.31,3472.57) 5407.31,3472.57 5407.31,3491.92 cw(c5415.31,3491.92) 5415.31,3499.92 cw(c5415.31,3491.92) 5423.31,3491.92 5423.31,3472.57 ccw(c5431.31,3472.57) 5431.31,3464.57 ccw(c5431.31,3472.57) 5439.31,3472.57 5439.31,3491.92 cw(c5447.31,3491.92) 5447.31,3499.92 cw(c5447.31,3491.92) 5455.31,3491.92 5455.31,3472.57 ccw(c5463.31,3472.57) 5463.31,3464.57 ccw(c5463.31,3472.57) 5471.31,3472.57 5471.31,3491.92 cw(c5479.31,3491.92) 5479.31,3499.92 cw(c5479.31,3491.92) 5487.31,3491.92 5487.31,3472.57 ccw(c5495.31,3472.57) 5495.31,3464.57 ccw(c5495.31,3472.57) 5503.31,3472.57 5503.31,3491.92 cw(c5511.31,3491.92) 5511.31,3499.92 cw(c5511.31,3491.92) 5519.31,3491.92 5519.31,3472.57 ccw(c5527.31,3472.57) 5527.31,3464.57 5535.31,3464.57 5543.31,3464.57 5576.41,3464.57 5661.42,3549.58 R64.1@5661.42,3633.27
  Bottom Layer w4: 5123.21,3430.29 5123.21,3347.81 5149.48,3321.53 5149.48,3294.65 5123.21,3268.38 5123.21,2898.52 5131.96,2889.76 v1(5162.21,2889.76)
  Bottom Layer w6: 5123.21,3430.29 5157.48,3464.57 5174.22,3464.57 5174.48,3464.32 5346.2,3464.32 v1(5346.46,3464.57)
ETHRXD1: Q1.B16 R65.1 | length 1574.8
  Top Layer w4: Q1.B16@5272.44,2968.5 5288.19,2984.25 5288.19,3003.87 5295.94,3011.62 5295.94,3075.47
  Top Layer w6: 5295.94,3075.47 5295.94,3138.46 5314.71,3157.23 5366.96,3157.23 5398.71,3188.98 ccw(c5393.05,3194.63) 5398.71,3200.29 5387.73,3211.27 cw(c5393.38,3216.93) 5387.73,3222.59 cw(c5393.38,3216.93) 5399.04,3222.59 5410.02,3211.6 ccw(c5415.68,3217.26) 5421.34,3211.6 ccw(c5415.68,3217.26) 5421.34,3222.92 5388.21,3256.05 cw(c5393.86,3261.7) 5388.21,3267.36 cw(c5393.86,3261.7) 5399.52,3267.36 5432.65,3234.23 ccw(c5438.31,3239.89) 5443.97,3234.23 ccw(c5438.31,3239.89) 5443.97,3245.54 5410.84,3278.67 cw(c5416.49,3284.33) 5410.84,3289.99 cw(c5416.49,3284.33) 5422.15,3289.99 5455.28,3256.86 ccw(c5460.94,3262.52) 5466.59,3256.86 ccw(c5460.94,3262.52) 5466.59,3268.17 5433.46,3301.3 cw(c5439.12,3306.96) 5433.46,3312.62 cw(c5439.12,3306.96) 5444.78,3312.62 5477.91,3279.49 ccw(c5483.56,3285.14) 5489.22,3279.49 ccw(c5483.56,3285.14) 5489.22,3290.8 5456.09,3323.93 cw(c5461.75,3329.59) 5456.09,3335.24 cw(c5461.75,3329.59) 5467.4,3335.24 5500.53,3302.11 ccw(c5506.19,3307.77) 5511.85,3302.11 ccw(c5506.19,3307.77) 5511.85,3313.43 5478.72,3346.56 cw(c5484.37,3352.21) 5478.72,3357.87 cw(c5484.37,3352.21) 5490.03,3357.87 5523.16,3324.74 ccw(c5528.82,3330.4) 5534.47,3324.74 ccw(c5528.82,3330.4) 5534.47,3336.05 5501.35,3369.18 cw(c5507,3374.84) 5501.35,3380.5 cw(c5507,3374.84) 5512.66,3380.5 5545.79,3347.37 ccw(c5551.45,3353.03) 5557.1,3347.37 5566.93,3357.2 5622.3,3412.57 5622.3,3463.32 5622.05,3463.57 v1(5622.05,3472.44)
  Bottom Layer w6: v1(5622.05,3472.44) 5637.8,3488.19 5637.8,3599.42 5638.05,3599.67 5638.05,3617.27 R65.1@5622.05,3633.27
ETHRXD2: Q1.F11 R66.1 | length 1498.9
  Top Layer w5: v1(5099.21,2858.27) Q1.F11@5114.96,2842.52
  Top Layer w6: v1(5181.1,3606.3) 5275.59,3511.81 5566.93,3511.81 5582.68,3527.56 R66.1@5582.68,3633.27
  Bottom Layer w4: 5091.21,3247.38 5091.21,2866.28 v1(5099.21,2858.27)
  Bottom Layer w6: 5091.21,3247.38 5004.5,3334.08 5004.5,3400.74 5004.25,3400.99 5004.25,3536.47 5066.46,3598.68 5108.99,3598.68 5109.49,3598.17 5172.98,3598.17 v1(5181.1,3606.3)
ETHRXD3: Q1.A10 R67.1 | length 1455.3
  Top Layer w6: v1(5062.99,3338.58) 5083.46,3318.11 Q1.A10@5083.46,3000 ; v1(5212.6,3606.3) 5228.35,3590.55 ccw(c5234,3596.21) 5239.66,3590.55 5277.84,3628.74 cw(c5283.5,3623.08) 5289.16,3628.73 cw(c5283.5,3623.08) 5289.16,3617.42 5245.32,3573.58 5242.3,3570.56 ccw(c5247.95,3564.9) 5242.3,3559.25 ccw(c5247.95,3564.9) 5253.61,3559.25 5256.63,3562.27 5300.47,3606.11 cw(c5306.13,3600.45) 5311.78,3606.11 cw(c5306.13,3600.45) 5311.78,3594.79 5267.94,3550.95 5264.92,3547.93 ccw(c5270.58,3542.28) 5264.92,3536.62 ccw(c5270.58,3542.28) 5276.24,3536.62 cw(c5279.26,3533.6) 5282.28,3536.62 5283.46,3535.43 5293.72,3525.18 5545.46,3525.18 R67.1@5559.06,3538.78
  Bottom Layer w6: v1(5062.99,3338.58) 5024.5,3377.07 5024.5,3528.44 5062.74,3566.68 5110.24,3566.68 5126.24,3582.68 5188.98,3582.68 v1(5212.6,3606.3)
ETHTXCLK: Q1.D17 R56.1 | length 345.7
  Top Layer w5: Q1.D17@5303.94,2905.51 v1(5319.69,2921.26)
  Bottom Layer w4: v1(5319.69,2921.26) 5319.69,2922.8 5350.43,2953.54 5350.43,3042.43 5337.83,3055.03 5337.83,3059.84
  Bottom Layer w6: 5337.83,3059.84 R56.1@5337.83,3226.69
ETHTXCTL: Q1.F12 R57.1 | length 551.1
  Top Layer w4: Q1.F12@5146.46,2842.52 v1(5162.2,2858.27)
  Bottom Layer w4: R57.1@5086.61,3341.93 5086.61,3311.93 5107.21,3291.34 5107.21,2889.65 5123.58,2873.27 5136.92,2873.27 5151.92,2858.27 v1(5162.2,2858.27)
ETHTXD0: Q1.E14 R58.1 | length 350.1
  Top Layer w5: Q1.E14@5209.45,2874.02 v1(5225.2,2889.76)
  Bottom Layer w4: R58.1@5173.23,3176.57 5173.23,3160.83 5157.48,3145.08 5157.48,2980.19 5178.7,2958.97 5178.7,2946.54 5188.98,2936.26 5199.91,2936.26 5208.7,2927.47 5208.7,2906.26 v1(5225.2,2889.76)
ETHTXD1: Q1.A16 R59.1 | length 283.3
  Top Layer w4: Q1.A16@5272.44,3000 5287.94,3015.5 5287.94,3042.77 5275.59,3055.12
  Top Layer w5: Q1.A16@5272.44,3000 Q1.A16@5275.59,3000
  Top Layer w6: 5275.59,3055.12 5275.59,3165.35 5299.46,3189.23 5321.59,3189.23 5321.84,3188.98 5330.71,3188.98 5338.58,3196.85 R59.1@5338.58,3223.82
ETHTXD2: Q1.E13 R60.1 | length 551.9
  Top Layer w5: Q1.E13@5177.95,2874.02 v1(5193.7,2889.76)
  Bottom Layer w4: R60.1@5141.73,3357.68 5157.48,3341.93 5157.48,3291.34 5131.21,3265.06 5131.21,2920.76 5147.2,2904.76 5168.42,2904.76 5183.42,2889.76 v1(5193.7,2889.76)
ETHTXD3: Q1.A15 R61.1 | length 110.3
  Top Layer w6: Q1.A15@5240.95,3000 5240.95,3031.5 5251.97,3042.52 R61.1@5251.97,3105.71
GCLK0_N: C164.1 Q1.V9 | length 206
  Top Layer w5: Q1.V9@5051.97,2464.57 v1(5067.72,2448.82)
  Bottom Layer w5: C164.1@5062.99,2280.12 5083.46,2300.59 5083.46,2433.07 v1(5067.72,2448.82)
GCLK0_P: C162.1 Q1.U9 | length 237.5
  Top Layer w5: Q1.U9@5051.97,2496.06 v1(5067.72,2480.32)
  Bottom Layer w5: C162.1@5031.5,2280.12 5051.97,2300.59 5051.97,2464.57 v1(5067.72,2480.32)
GCLK1_N: C167.1 Q1.V5 | length 203.2
  Top Layer w5: v1(4910.24,2448.82) Q1.V5@4925.98,2464.57
  Bottom Layer w5: C167.1@4744.69,2456.69 4759.31,2471.32 4834.32,2471.32 4841.32,2464.32 4894.74,2464.32 v1(4910.24,2448.82)
GCLK1_P: C165.1 Q1.U5 | length 207.4
  Top Layer w5: v1(4910.24,2480.31) Q1.U5@4925.98,2496.06
  Bottom Layer w5: C165.1@4744.69,2496.06 4760.43,2480.32 4823.62,2480.32 4839.37,2496.06 4894.49,2496.06 v1(4910.24,2480.31)